# Altium PCB 复旦微阀控NB三川款主控线路板拼板_pcb.pcbdoc
Units mil, origin at the board's own origin, x right, y up, seen from the top; angles counter-clockwise.
Board outline 2380 x 2160 mil, 2 copper layers (Top Layer, Bottom Layer); 139 components, 92 nets, 421 pads, 392 vias.
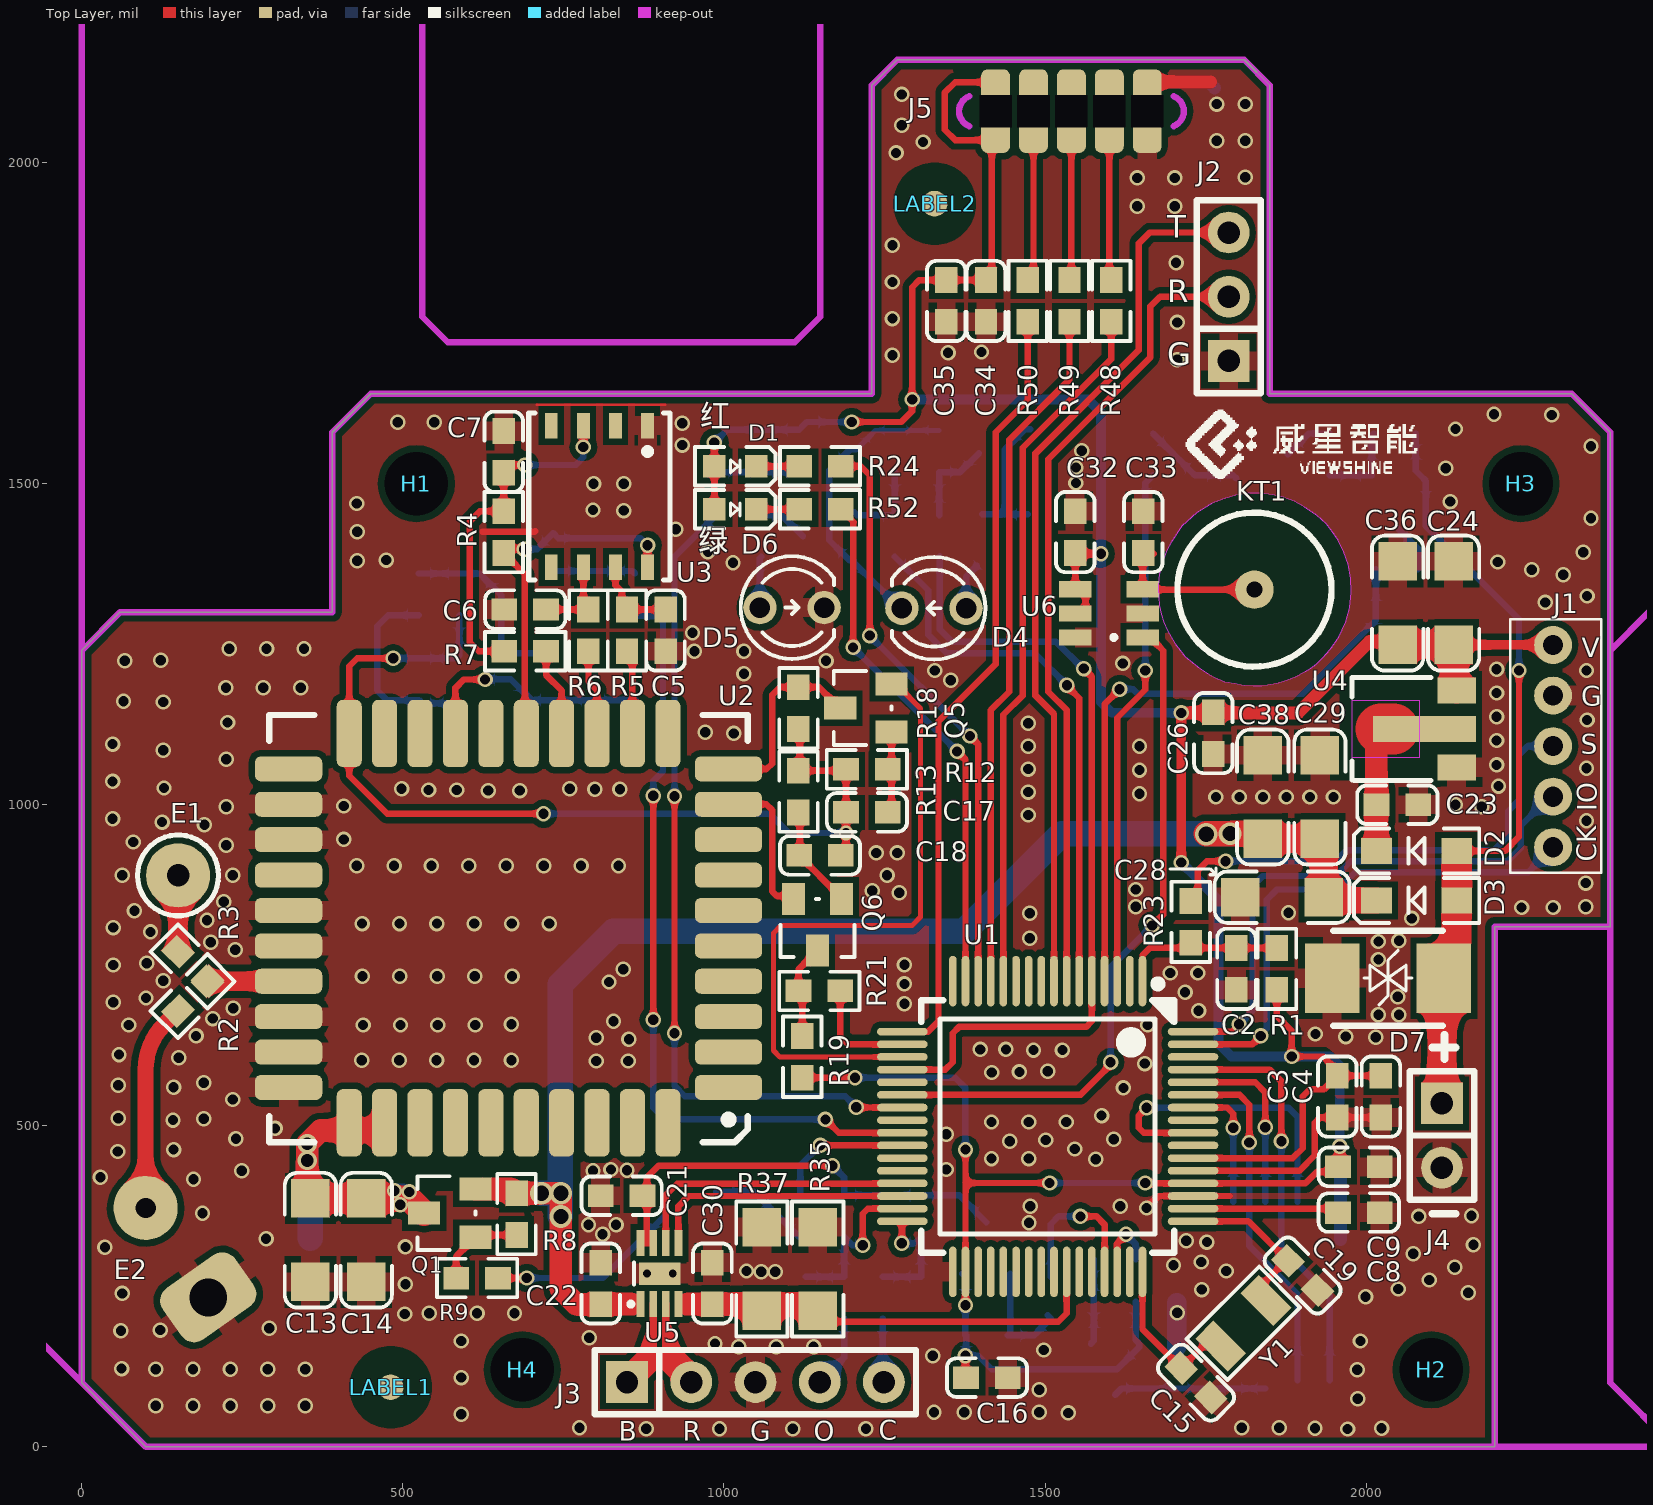
[diagram p0: Top Layer view]
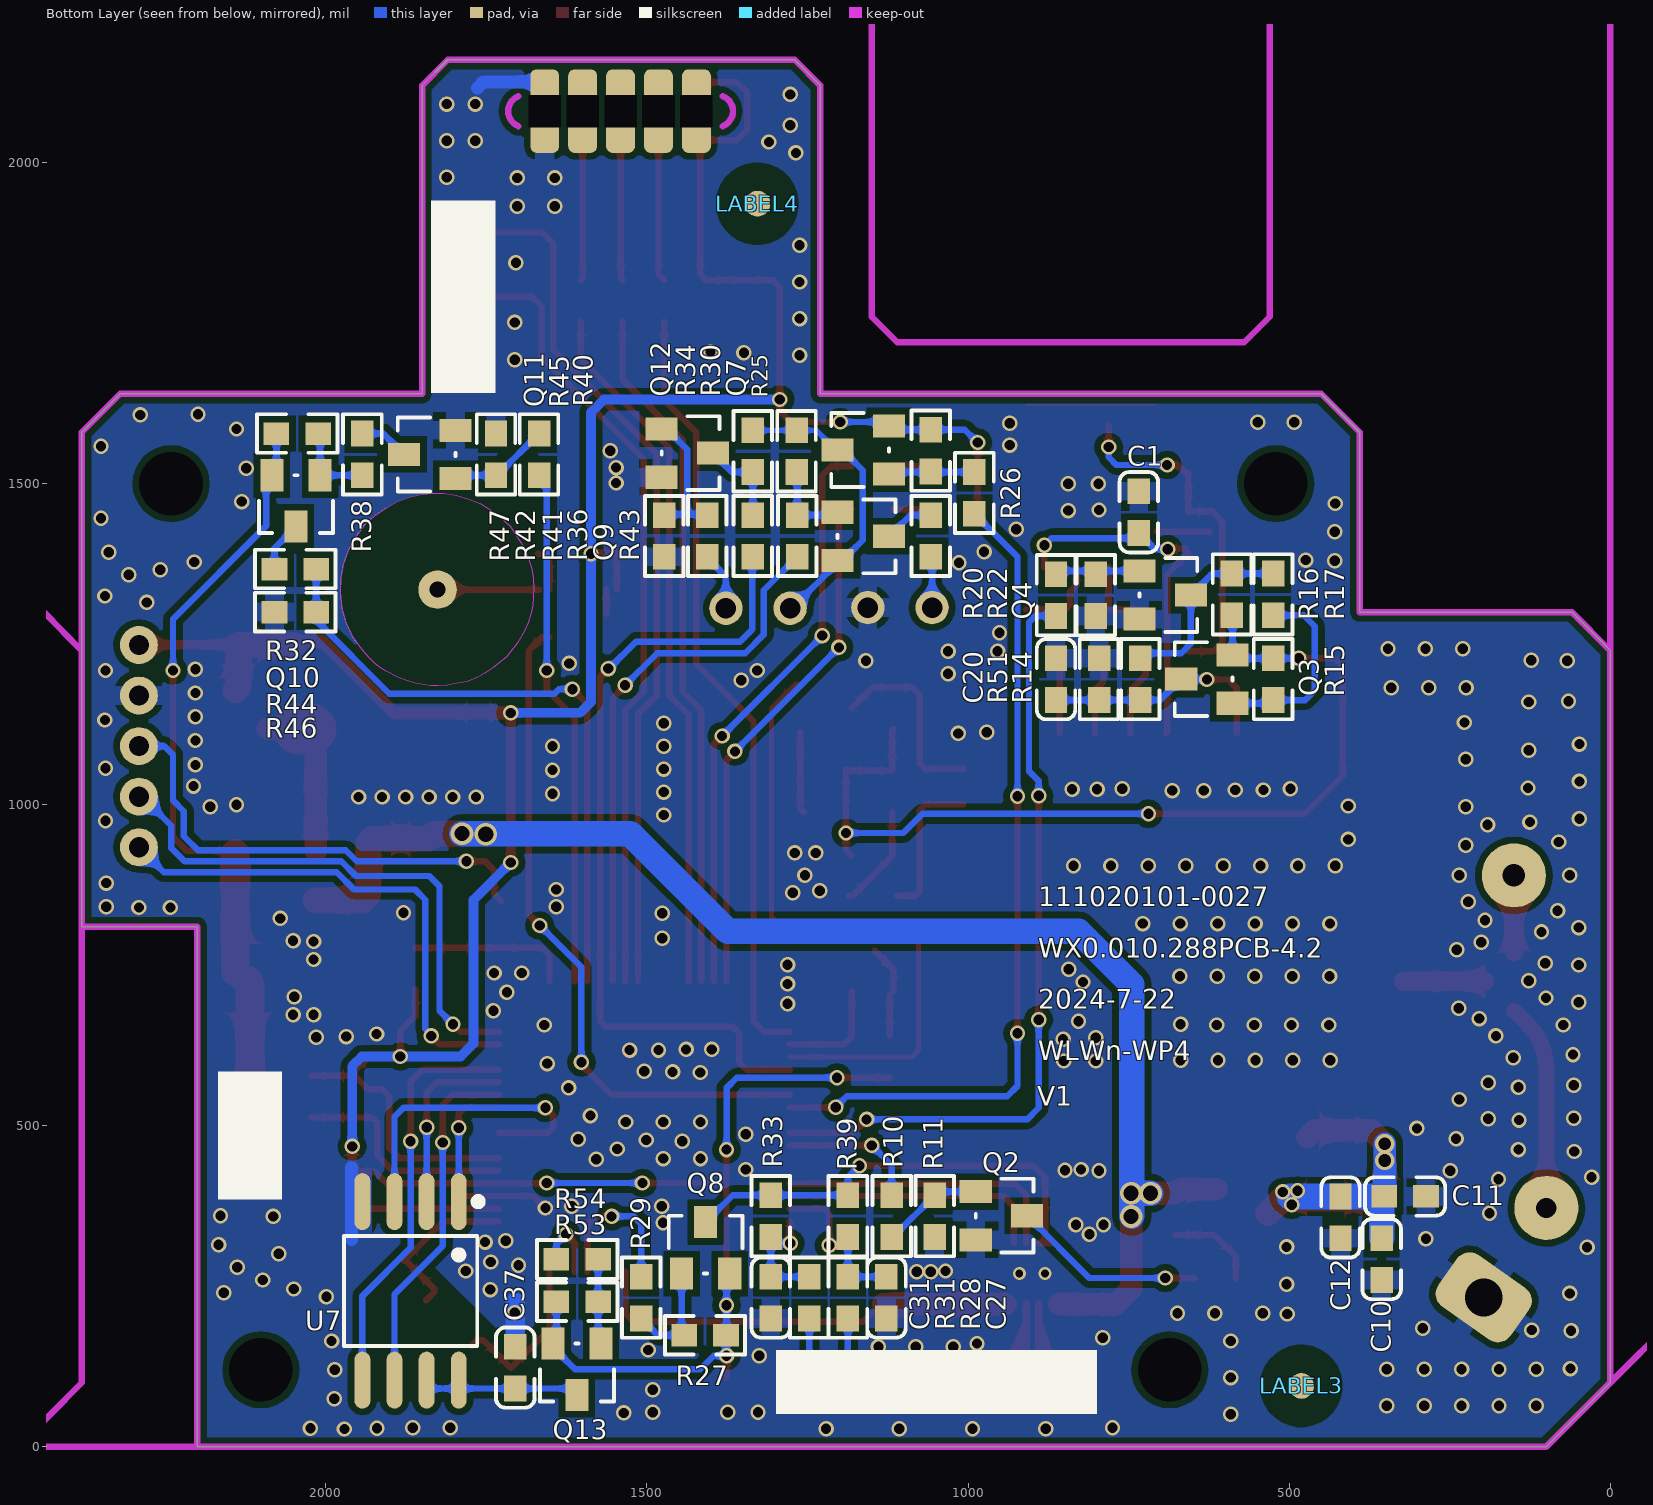
[diagram p1: Bottom Layer view, seen from below]

## Layer stack, top to bottom
Top Solder: solder mask 0.4, Solder Resist, Dk 3.5
Top Layer: signal copper 1.4
Dielectric1: dielectric 12.6, FR-4, Dk 4.8
Bottom Layer: signal copper 1.4
Bottom Solder: solder mask 0.4, Solder Resist, Dk 3.5

## Board outline
0,100 0,1240 60,1300 390,1300 390,1580 450,1640 1230,1640 1230,2120 1270,2160 1810,2160 1850,2120 1850,1640 2320,1640 2380,1580 2380,810 2200,810 2200,0 100,0
cut-out: -3391,-1710 -3381,-1710 -3381,-1700 -3391,-1700

## Design rules (kind name [scope] priority, off if disabled: settings)
Clearance Clearance_1 [inpolygon] p1: gap=10 ignorepadtopadclearanceinfootprint=FALSE except(0: Arc-Hole Track-Hole SMDPad-Hole THPad-Hole Via-Hole Fill-Hole Poly-Hole Region-Hole Text-Hole)
Clearance [All] p2: gap=7 ignorepadtopadclearanceinfootprint=FALSE except(0: Arc-Hole Track-Hole SMDPad-Hole THPad-Hole Via-Hole Fill-Hole Poly-Hole Region-Hole Text-Hole)
ComponentClearance [All] p1 off: gap=0 collisioncheckmode=3 verticalgap=0 showdistances=FALSE
FabricationTestPointUsage TestPointUsage [All] p1: valid=0 allowmultiple=FALSE
FabricationTestpoint Testpoint [All] p1: side=3 testpointundercomponent=TRUE minsize=40 maxsize=100 preferedsize=60 minholesize=0 maxholesize=40 preferedholesize=32 testpointgrid=1 allowsidetop=TRUE allowsidebottom=TRUE usegrid=TRUE gridtolerance=0.01
PolygonConnect [isvia] p1: connectstyle=Direct reliefconductorwidth=10 reliefentries=4 polygonreliefangle="90 Angle" airgapwidth=10
PolygonConnect PolygonConnect_1 [All] p2: connectstyle=Relief reliefconductorwidth=30 reliefentries=4 polygonreliefangle="90 Angle" airgapwidth=10
RoutingVias [All] p1: holewidth=16 width=24 viastyle="Through Hole" minholewidth=10 minwidth=18 maxholewidth=28 maxwidth=50
SilkToSilkClearance [All] p1: silktosilkclearance=0
SolderMaskExpansion [All] p1: expansion=4
Width [All] p1: maxlimit=50 minlimit=2 preferedwidth=10
26 further rules are at their usual default settings.

## Components (designator, comment, footprint, x,y, rotation, side; value= is the part's Value field where it differs from the comment)
C1 "100nF" C0603 734,1488 r270 bottom
C2 "100nF" C0603 1798,712 r90 top
C3 "100nF" C0603 1955,513 r90 top
C4 "10μF/10V" C0603 2023,513 r90 top
C5 "33pF" C0603 909,1239 r90 top
C6 "33pF" C0603 658,1304 r0 top
C7 "33pF" C0603 657,1517 r90 top
C8 "100nF" C0603 2021,365 r180 top
C9 "100nF" C0603 2021,436 r180 top
C10 "22pF" C0603 356,260 r90 bottom
C11 "100pF" C0603 287,390 r0 bottom
C12 "100nF" C0603 420,325 r90 bottom
C13 "100uF" C1206 356,257 r90 top
C14 "100uF" C1206 443,257 r90 top
C15 "22pF" C0603 1757.96,77.04 r135 top
C16 "100nF" C0603 1442,108 r180 top
C17 "1nF" C0603 1255,988 r180 top
C18 "1nF" C0603 1182,921 r180 top
C19 "22pF" C0603 1923.96,244.04 r135 top
C20 "33pF" C0603 863,1228 r270 bottom
C21 "100nF" C0603 808,391 r0 top
C22 "100nF" C0603 808,222 r90 top
C23 "100pF" C0603 2081,1000 r180 top
C24 "100uF" C1206 2136,1379 r270 top
C26 "100nF" C0603 1762,1079 r90 top
C27 "10nF" C0603 1127,265 r270 bottom
C28 "100uF" C1206 1804,856 r0 top
C29 "100uF" C1206 1928,1077 r270 top
C30 "10nF" C0603 982,287 r270 top
C31 "10nF" C0603 1307,200 r90 bottom
C32 "100nF" C0603 1547,1392 r90 top
C33 "4.7pF" C0603 1653,1457 r270 top
C34 "100nF" C0603 1408,1752 r90 top
C35 "1μF/16V" C0603 1346,1752 r90 top
C36 "100uF" C1206 2049,1379 r270 top
C37 "100nF" C0603 1705,156 r270 bottom
C38 "100uF" C1206 1839,1077 r270 top
D1 "Red" LED-0603 985,1527 r0 top
D2 "DSK14" SOD-123 2141,928 r180 top
D3 "DSK14" SOD-123 2141,851 r180 top
D4 "AT403" LED-3 1327,1306 r180 top
D5 "AT203-立" LED-3 1106,1307 r0 top
D6 "Green" LED-0603 985,1460 r0 top
D7 "SMBJ6.0CA" TVS-SMB 2034,730 r180 top
E1 "" ANT-1 150,890 r0 top locked
E2 "ANTENNA_3" ANT-3 197,233 r35 top
H1 "" HOLE-2.5 521,1500 r0 top locked
H2 "" HOLE-2.5 2101,120 r0 top locked
H3 "" HOLE-2.5 2241,1500 r0 top locked
H4 "" HOLE-2.5 686,120 r0 top locked
J1 "CON5-2.0" J_DIP_2.0_1*05_H 2291,1248.74 r270 top
J2 "CON3" SIP-3 1786,1691 r90 top
J3 "CON5" SIP-5 849,101 r0 top
J4 "CON2" SIP-2 2118,535 r270 top
J5 "BCON-B5" BCON-B5 1541,2080 r180 top locked
KT1 "Touch" TOUCH-1 1826,1335 r0 top locked
LABEL1 "" MARK 481,93 r90 top
LABEL2 "" MARK 1328,1936 r90 top
LABEL3 "" MARK 481,95 r90 bottom
LABEL4 "" MARK 1328,1936 r90 bottom
LABEL5 "" MARK -101.17,6993 r90 top (schematic designator LABEL1)
LABEL6 "" MARK -101.17,6766 r90 bottom (schematic designator LABEL1)
LABEL7 "" MARK 4858.83,1015 r90 top (schematic designator LABEL1)
LABEL8 "" MARK 4856.83,1301 r90 bottom (schematic designator LABEL1)
Q1 "CJ2301" SOT-23 613,326.5 r90 top
Q2 "S8050" SOT-23 988,397.5 r270 bottom
Q3 "S8550" SOT-23 588,1158 r90 bottom
Q4 "S8050" SOT-23 733,1364 r270 bottom
Q5 "S8050" SOT-23 1261,1113 r90 top
Q6 "S8050" SOT-23 1183,853 r180 top
Q7 "CJ2301" SOT-23 1123,1515 r90 bottom
Q8 "CJ2301" SOT-23 1446,270 r180 bottom
Q9 "CJ2301" SOT-23 1203,1455.5 r270 bottom
Q10 "CJ2301" SOT-23 2009,1513 r0 bottom
Q11 "S8050" SOT-23 1798,1508 r90 bottom
Q12 "S8050" SOT-23 1477,1585 r270 bottom
Q13 "S8550" SOT-23 1571.5,161 r0 bottom
R1 "10kΩ±5%" R0603 1861,777 r270 top
R2 "0Ω±5%" R0603 195.63,725.04 r225 top
R3 "0Ω±5%" R0603 149.67,771 r315 top
R4 "10kΩ±5%" R0603 657,1457 r270 top
R5 "22Ω±5%" R0603 849,1304 r270 top
R6 "22Ω±5%" R0603 789,1304 r270 top
R7 "22Ω±5%" R0603 658,1239 r0 top
R8 "200KΩ±5%" R0603 677,330 r90 top
R9 "10kΩ±5%" R0603 648,263 r180 top
R10 "4.7kΩ±5%" R0603 1119,392 r270 bottom
R11 "47K±5%" R0603 1052,327 r90 bottom
R12 "4.7kΩ±5%" R0603 1190,1055 r0 top
R13 "4.7kΩ±5%" R0603 1116,988 r90 top
R14 "0Ω±5%" R0603 732,1228 r270 bottom
R15 "47K±5%" R0603 525,1163 r90 bottom
R16 "10kΩ±5%" R0603 589,1360 r270 bottom
R17 "4.7kΩ±5%" R0603 525,1360 r270 bottom
R18 "10kΩ±5%" R0603 1116,1183 r270 top
R19 "10kΩ±5%" R0603 1122,575 r90 top
R20 "4.7kΩ±5%" R0603 863,1359 r270 bottom
R21 "0Ω±5%" R0603 1116,710 r0 top
R22 "47K±5%" R0603 801,1294 r90 bottom
R23 "0Ω±5%" R0603 1727,785 r90 top
R24 "1kΩ±5%" R0603 1117,1527 r0 top
R25 "1MΩ±5%" R0603 1058,1519 r90 bottom
R26 "1kΩ±5%" R0603 990,1453 r90 bottom
R27 "1MΩ±5%" R0603 1442,174 r180 bottom
R28 "100Ω±5%" R0603 1187,265 r270 bottom
R29 "10kΩ±5%" R0603 1509,200 r90 bottom
R30 "1MΩ±5%" R0603 1267,1518 r90 bottom
R31 "100Ω±5%" R0603 1247,265 r270 bottom
R32 "1MΩ±5%" R0603 2012,1578 r0 bottom
R33 "1kΩ±5%" R0603 1307,327 r90 bottom
R34 "100kΩ±5%" R0603 1335,1518 r90 bottom
R35 "1Ω±1%" R1206 1146,342 r270 top
R36 "1kΩ±5%" R0603 1266,1386 r90 bottom
R37 "1Ω±1%" R1206 1059,342 r270 top
R38 "10kΩ±5%" R0603 1943,1578 r270 bottom
R39 "1kΩ±5%" R0603 1187,327 r90 bottom
R40 "4.7kΩ±5%" R0603 1668,1513 r90 bottom
R41 "0Ω±5%" R0603 1335,1451 r270 bottom
R42 "20kΩ±5%" R0603 1406,1451 r270 bottom
R43 "100Ω±5%" R0603 1058,1386 r90 bottom
R44 "20K±1%" R0603 2080,1367 r180 bottom
R45 "47K±5%" R0603 1735,1578 r270 bottom
R46 "10kΩ±1%" R0603 2015,1300 r0 bottom
R47 "47K±5%" R0603 1473,1386 r90 bottom
R48 "100Ω±5%" R0603 1603,1752 r90 top
R49 "100Ω±5%" R0603 1538,1752 r90 top
R50 "100Ω±5%" R0603 1473,1752 r90 top
R51 "10kΩ±5%" R0603 796,1228 r270 bottom
R52 "1kΩ±5%" R0603 1117,1460 r0 top
R53 "200KΩ±5%" R0603 1576,226 r0 bottom
R54 "10kΩ±5%" R0603 1641,292 r180 bottom
U1 "FM33LE026" LQFP-64_L10.0-W10.0-P0.50-LS12.0-BL 1504,499 r180 top
U2 "UMN601" MB26-Y0B 1007.04,559.76 r180 top
U3 "ESIM" MFF2 881,1590 r270 top
U4 "CE6232A33P" SOT89 2043,1118 r90 top
U5 "DRV8837" WSON-8 870,222.5 r90 top
U6 "TTP233H" SOT-23-6 1652,1260.5 r90 top
U7 "P25Q32H-SUH-IR" SOIC-8 1868,243.02 r0 bottom
Y1 "32.768K" Y3215 1844,228 r225 top

## Footprints (in the part's own frame and the unit in brackets; to place one, negate y for a bottom-side part, rotate by r counter-clockwise, add the part's x,y. Pads: shape width x height; smd on the part's side, far side on the other; paste and mask are expansions set on the pad)
ANT-1 [mil]
  round 100 hole 35: 1(0,0)
  silkscreen extent -63,-63 63,63
ANT-3 [mm]
  round 2.54 hole 0.8: 1(0,4.318)
  rrect50% 3.5x2.5 hole 1.5: 2(0,0)
BCON-B5 [mil]
  rrect50% 45x40 all layers, no hole: 1(-118.11,-45) 1(-118.11,45) 2(-59.06,45) 2(-59.06,-45) 3(0,45) 3(0,-45) 4(59.06,45) 4(59.06,-45) 5(118.11,-45) 5(118.11,45)
  rect 45x70 hole 50 square: 1(-118.11,0) 2(-59.06,0) 3(0,0) 4(59.06,0) 5(118.11,0)
  Keep-Out Layer lines w10: 159.28,23.21 cw(c150,0) 159.28,-23.21 ; -159.28,23.21 ccw(c-150,0) -159.28,-23.21
C0603 [mil]
  rect 40x35 smd: 1(0,0) 2(65,0)
  silkscreen extent -30,-30 95,30
C1206 [mil]
  rect 60x60 smd: 1(0,0) 2(130,0)
  silkscreen extent -40,-40 170,40
HOLE-2.5 [mil]
  round 50 hole 99 unplated: 0(0,0)
J_DIP_2.0_1*05_H [mm]
  round 1.5 hole 0.8: 1(0,0) 2(2,0) 3(4,0) 4(6,0) 5(8,0)
  silkscreen extent -1.02,-1.7 9.02,1.91
LED-3 [mil]
  round 52 hole 31.93: 1(-50,0) 2(50,0)
  silkscreen extent -80,-80 66,80
LED-0603 [mil]
  rect 35x35 smd: 1(0,0) 2(65,0)
  silkscreen extent -30,-30 95,30
LQFP-64_L10.0-W10.0-P0.50-LS12.0-BL [mm]
  oval 0.3x2 smd: 1(-3.75,-5.75) 2(-3.25,-5.75) 3(-2.75,-5.75) 4(-2.25,-5.75) 5(-1.75,-5.75) 6(-1.25,-5.75) 7(-0.75,-5.75) 8(-0.25,-5.75) 9(0.25,-5.75) 10(0.75,-5.75) 11(1.25,-5.75) 12(1.75,-5.75) 13(2.25,-5.75) 14(2.75,-5.75) 15(3.25,-5.75) 16(3.75,-5.75) 33(3.75,5.75) 34(3.25,5.75) 35(2.75,5.75) 36(2.25,5.75) 37(1.75,5.75) 38(1.25,5.75) 39(0.75,5.75) 40(0.25,5.75) 41(-0.25,5.75) 42(-0.75,5.75) 43(-1.25,5.75) 44(-1.75,5.75) 45(-2.25,5.75) 46(-2.75,5.75) 47(-3.25,5.75) 48(-3.75,5.75)
  oval 2x0.3 smd: 17(5.75,-3.75) 18(5.75,-3.25) 19(5.75,-2.75) 20(5.75,-2.25) 21(5.75,-1.75) 22(5.75,-1.25) 23(5.75,-0.75) 24(5.75,-0.25) 25(5.75,0.25) 26(5.75,0.75) 27(5.75,1.25) 28(5.75,1.75) 29(5.75,2.25) 30(5.75,2.75) 31(5.75,3.25) 32(5.75,3.75) 49(-5.75,3.75) 50(-5.75,3.25) 51(-5.75,2.75) 52(-5.75,2.25) 53(-5.75,1.75) 54(-5.75,1.25) 55(-5.75,0.75) 56(-5.75,0.25) 57(-5.75,-0.25) 58(-5.75,-0.75) 59(-5.75,-1.25) 60(-5.75,-1.75) 61(-5.75,-2.25) 62(-5.75,-2.75) 63(-5.75,-3.25) 64(-5.75,-3.75)
  silkscreen extent -5,-5.79 5,5
MARK [mil]
  round 40 smd mask+40: 0(0,0)
MB26-Y0B [mil]
  rrect50% 105x39 smd: 1(0,0) 2(0,-55.12) 3(0,-110.24) 4(0,-165.35) 5(0,-220.47) 6(0,-275.59) 7(0,-330.71) 8(0,-385.83) 9(0,-440.94) 10(0,-496.06) 21(685.04,-496.06) 22(685.04,-440.94) 23(685.04,-385.83) 24(685.04,-330.71) 25(685.04,-275.59) 26(685.04,-220.47) 27(685.04,-165.35) 28(685.04,-110.24) 29(685.04,-55.12) 30(685.04,0)
  rrect50% 39x105 smd: 11(94.49,-551.18) 12(149.61,-551.18) 13(204.72,-551.18) 14(259.84,-551.18) 15(314.96,-551.18) 16(370.08,-551.18) 17(425.2,-551.18) 18(480.31,-551.18) 19(535.43,-551.18) 20(590.55,-551.18) 31(590.55,55.12) 32(535.43,55.12) 33(480.31,55.12) 34(425.2,55.12) 35(370.08,55.12) 36(314.96,55.12) 37(259.84,55.12) 38(204.72,55.12) 39(149.61,55.12) 40(94.49,55.12)
  silkscreen extent -30,-580 715,85
MFF2 [mil]
  rect 40x20 smd: 1(0,0) 2(0,-50) 3(0,-100) 4(0,-150) 5(220,-150) 6(220,-100) 7(220,-50) 8(220,0)
  silkscreen extent -20,-185 240,35
R0603 [mil]
  rect 40x35 smd: 1(0,0) 2(65,0)
  silkscreen extent -30,-30 95,30
R1206 [mil]
  rect 60x60 smd: 1(0,0) 2(130,0)
  silkscreen extent -40,-40 170,40
SIP-2 [mil]
  rect 65x65 hole 35: 1(0,0)
  round 65 hole 35: 2(100,0)
  silkscreen extent -50,-50 150,50
SIP-3 [mil]
  rect 65x65 hole 35: 1(0,0)
  round 65 hole 35: 2(100,0) 3(200,0)
  silkscreen extent -50,-50 250,50
SIP-5 [mil]
  rect 65x65 hole 35: 1(0,0)
  round 65 hole 35: 2(100,0) 3(200,0) 4(300,0) 5(400,0)
  silkscreen extent -50,-50 450,50
SOD-123 [mil]
  rect 48x40 smd: 1(0,0) 2(125,0)
  silkscreen extent -35,-35 160,35
SOIC-8 [mm]
  oval 0.63x2.25 smd: 1(-1.905,-3.53) 2(-0.635,-3.53) 3(0.635,-3.53) 4(1.905,-3.53) 5(1.905,3.53) 6(0.635,3.53) 7(-0.635,3.53) 8(-1.905,3.53)
  silkscreen extent -2.82,-3.68 2.64,2.18
SOT89 [mil]
  rect 40x60 smd: 1(-60,-97.98) 2(60,-97.98)
  rect 40x160.63 smd: 3(0,-47.66)
  Top Layer lines w80: 0,20 0,0.49
  Top Layer keep-out region: -45,65 45,65 45,-40 -45,-40
  silkscreen extent -80,-58 80,65
SOT-23 [mil]
  rect 36x50 smd: 1(0,0) 2(75,0) 3(37.5,80)
  silkscreen extent -20,0 95,90
SOT-23-6 [mil]
  rect 25x50 smd: 1(0,0) 2(37.5,0) 3(75,0) 4(75,105) 5(37.5,105) 6(0,105)
  silkscreen extent -3,42 3,48
TOUCH-1 [mil]
  round 60 hole 25: 1(0,0)
  silkscreen extent -120,-120 120,120
TVS-SMB [mil]
  rect 85x108 smd: 1(-87,0) 2(87,0)
  silkscreen extent -85,-74 85,74
WSON-8 [mil]
  rect 35x64 smd: 0(47.5,-30)
  rect 40x12 smd: 1(0,0) 2(0,-19.69) 3(0,-39.37) 4(0,-59.06) 5(95,-59.06) 6(95,-39.37) 7(95,-19.69) 8(95,0)
  silkscreen extent -3,10 65,18
Y3215 [mil]
  rect 40x72 smd: 1(0,0) 2(100,0)
  silkscreen extent -30,-45 130,45

## Part data
C1 C2 C3 C8 C9 C12 C16 C21 C22 C26 C32 C34 C37: library part 1, "贴片电容,100nF±10%/50V,X7R,国巨"
C4: library part 8, "贴片电容,10μF±10%/10V,X7R,村田"
C5 C6 C7 C20: library part 4, "贴片电容,33pF±10%/50V,NP0,国巨"
C10 C15 C19: library part 3, "贴片电容,22pF±5%/50V,NP0,国巨"
C11 C23: library part 9, "贴片电容,100pF±10%/50V,NP0,国巨"
C13 C14 C24 C28 C29 C36 C38: library part 16, "贴片电容,100uF±20%/6.3V,X5R,村田"
C17 C18: library part 6, "贴片电容,1nF±10%/50V,X7R,国巨"
C27 C30 C31: library part 5, "贴片电容,10nF±10%/50V,X7R,国巨"
C33: library part 18, "贴片电容,4.7pF±0.25pF/50V,NPO,国巨"
C35: library part 2, "贴片电容,1μF±10%/16V,X7R,国巨"
D1: library part 3, "发光二极管,红色,0603,光宝"
D2 D3: library part 8, "DSK14,SOD-123FL,1 A,40 V,28 V,台湾强茂集团苏州群鑫电子,DSK14"
D4: library part 6, "红外接收头，插件，红光，AT403_PD_01"
D5: library part 5, "红外发射头，插件，红光，AT203"
D6: library part 5, "发光二极管,绿色,亿光，19-217/GHC-YR1S2/3T"
D7: library part 7, "双向贴片TVS管，SMBJ6.0CA_C211762，SMB,杨杰"
E1: library part 1, "天线,5mm弹簧,电信"
E2: library part 28, "外置天线焊盘（固定孔）"
H1 H2 H3 H4: library part 22, "定位孔,孔径2.5mm,非金属化,无电气连接"
J1: library part 15, "焊接插座,间距2.0mm"
J2: library part 2, "焊接插座,间距2.54mm"
J3: library part 4, "焊接插座,间距2.54mm"
J4: library part 1, "焊接插座,间距2.54mm"
J5: library part 9, "焊接插座,90度插板双面焊盘,母头,间距1.5mm"
KT1: library part 2, "按键,6mm弹簧按键,按键直径10mm"
LABEL1 LABEL2 LABEL3 LABEL4 LABEL5 LABEL6 LABEL7 LABEL8: library part 1, "标准Mark点,直径1mm,阻焊开窗3mm"
Q1 Q7 Q8 Q9 Q10: library part 2, "贴片MOS管,PMOS,CJ2301,江苏长电"
Q2 Q4 Q5 Q6 Q11 Q12: library part 1, "贴片三极管,NPN,S8050(L),江苏长电"
Q3 Q13: library part 2, "贴片三极管,PNP,S8550(L),江苏长电"
R1 R4 R9 R16 R18 R19 R29 R38 R51 R54: library part 2, "贴片电阻,10kΩ±5%,1/10W,100ppm/℃,国巨"
R2 R3 R14 R21 R23 R41: library part 15, "贴片电阻,0Ω±5%,1/10W,100ppm/℃,国巨"
R5 R6 R7: library part 14, "贴片电阻,22Ω±5%,1/10W,100ppm/℃,国巨"
R8 R53: library part 16, "贴片电阻,200kΩ±5%,200mW,100ppm/℃,国巨"
R10 R12 R13 R17 R20 R40: library part 12, "贴片电阻,4.7kΩ±5%,1/10W,100ppm/℃,国巨"
R11 R15 R22 R45 R47: library part 22, "贴片电阻，47K,±5%,1/10W,0603,国巨,RC0603JR-0747KL"
R24 R26 R33 R36 R39 R52: library part 1, "贴片电阻,1kΩ±5%,1/10W,100ppm/℃,国巨"
R25 R27 R30 R32: library part 4, "贴片电阻,1MΩ±5%,1/10W,100ppm/℃,国巨"
R28 R31 R43 R48 R49 R50: library part 5, "贴片电阻,100Ω±5%,1/10W,100ppm/℃,国巨"
R34: library part 3, "贴片电阻,100kΩ±5%,1/10W,100ppm/℃,国巨"
R35 R37: library part 41, "贴片电阻，1Ω±1%,1/4W,1206,国巨,RC1206FR-071RL"
R42: library part 7, "贴片电阻,20kΩ±5%,1/10W,100ppm/℃,国巨"
R44: library part 23, "贴片电阻，20K,±1%,1/10W,0603,国巨,RC0603FR-0720KL"
R46: library part 6, "贴片电阻,10kΩ±1%,1/10W,100ppm/℃,国巨"
U1: library part 10, "单片机,FM33LE026,复旦微"
U2: library part 3, "集成电路,MB26-Y0B,利尔达"
U3: library part 2, "集成电路,ESIM,杭州电信"
U4: library part 6, "集成电路，CE6232A33P,SOT89"
U5: library part 2, "集成电路,DRV8837DSGR,TI"
U6: library part 5, "集成电路，TTP233H,TONTEK"
U7: library part 10, "集成电路，P25Q32H-SUH-IR，SOP-8,普冉半导体（上海）"
Y1: library part 2, "晶振,32.768KHz,±20ppm,12.5pF,3215,EPSON"

## Via types
v1: diameter 24, hole 16, Top Layer to Bottom Layer, tented both sides, 383 vias
v2: diameter 35.43, hole 23.62, Top Layer to Bottom Layer, tented both sides, 5 vias
v3: diameter 20, hole 12, Top Layer to Bottom Layer, 2 vias
v4: diameter 30, hole 20, Top Layer to Bottom Layer, tented both sides, 2 vias

## Nets (pads, with @x,y where several pads share a name; then routed paths per layer and width w, separated by ;. In a path a pad name is that pad's centre, name@x,y a point inside that pad or via, vN(x,y) a via of type N, cw(c..) or ccw(c..) an arc to the next point about the centre after c; other vN are vias at no path point)
AIN8: C30.2 R35.2 R37.2 U1.42 U5.4 | length 655.8
  Top Layer w10: R35.2 1163,195 1520.53,195 1533.53,208 U1.42
  Top Layer w35: 941,222.5 1131.5,222.5 R35.2@1132,222
ANT: R2.1 R3.2 U2.27 | length 126.4
  Top Layer w30: R2.1 195.71,725.12 U2.27
CLOSE: C31.2 R31.1 R33.1 U1.32 | length 190.8
  Top Layer w10: v1(1277,317) 1277,350.73 U1.32
  Bottom Layer w10: R31.1 C31.2 R33.1 1297,317 v1(1277,317)
CTR_F_VCC: R54.1 U1.46 | length 109.3
  Top Layer w10: U1.46 1612.27,317.27 v1(1626,331)
  Bottom Layer w10: v1(1626,331) 1641,316 R54.1
DB_RXD: J2.2 U1.7 | length 1256.5
  Top Layer w10: U1.7 1533.53,1147.47 1505,1176 1505,1538 1664,1697 1664,1776 1679,1791 J2.2
DB_TXD: J2.3 U1.8 | length 1374.3
  Top Layer w10: U1.8 1513.84,1141.16 1485,1170 1485,1547 1646,1708 1646,1874 1663,1891 J2.3
DRV+: J3.1 U5.2 | length 138.4
  Top Layer w12: J3.1 889.69,141.68 U5.2
DRV-: J3.2 U5.3 | length 137.9
  Top Layer w12: U5.3 909.37,140.63 J3.2
EXTI1: R48.1 U1.12 | length 1096.2
  Top Layer w10: U1.12 1435.1,1140.1 1465,1170 1465,1556 1603,1694 R48.1
EXTI2: R49.1 U1.13 | length 1077.4
  Top Layer w10: U1.13 1415.42,1147.42 1444,1176 1444,1568 1538,1662 R49.1
EXTI3: R50.1 U1.17 | length 1209.7
  Top Layer w10: U1.17 1317.64,646.64 1334,663 1334,1130 1423,1219 1423,1580 1473,1630 R50.1
EXTI4: R41.2 U1.5 U1.20 | length 1270.5
  Top Layer w10: U1.20 1344.58,587.58 1356,599 1356,644 1366,654 1563.9,654 1572.9,663 U1.5 1572.9,1199.1 v1(1560,1212)
  Bottom Layer w10: R41.2@1336,1387 1336,1273 1355,1254 1517,1254 1559,1212 v1(1560,1212)
FLASH_CLK: U1.59 U7.6 | length 553.9
  Top Layer w10: U1.59 1802.79,548.21 1818,533 v1(1818,474)
  Bottom Layer w10: v1(1818,474) 1818,313 1893,238 U7.6
FLASH_CS: U1.58 U7.1 | length 203.6
  Top Layer w10: U1.58 1783.47,528.53 1793,519 v1(1793,497)
  Bottom Layer w10: U7.1 v1(1793,497)
FLASH_MISO: U1.60 U7.2 | length 289.2
  Top Layer w10: U1.60 1827.1,567.9 1843,552 v1(1843,498)
  Bottom Layer w10: U7.2 v1(1843,498)
FLASH_MOSI: U1.61 U7.5 | length 641.3
  Top Layer w10: U1.61 1849.42,587.58 1868,569 v1(1868,476)
  Bottom Layer w10: v1(1868,476) 1868,310 1943,235 U7.5
FLASH_VCC: C37.2 Q13.3 U7.7 U7.8 | length 238.1
  Bottom Layer w10: Q13.3 1619,91 C37.2 U7.7@1843,91
FLASH_WP: U1.56 U7.3 | length 496.4
  Top Layer w10: v1(1658,528) 1646,516 1646,497 1653.84,489.16 U1.56
  Bottom Layer w10: v1(1658,528) 1879,528 1893,514 U7.3
GND: C1.1 C2.1 C3.1 C4.1 C5.1 C6.1 C7.2 C8.1 C9.1 C10.1 C11.1 C12.1 C13.1 C14.1 C15.1 C16.1 C19.1 C20.1 C21.1 C22.2 C23.1 C24.1 C26.1 C27.2 C28.1 C29.1 C30.1 C31.1 C32.2 C33.1 C34.1 C35.1 C36.1 C37.1 C38.1 D5.2 D7.2 E2.2 J1.2 J2.1 J3.3 J4.2 J5.1 Q2.2 Q4.2 Q11.2 Q12.2 R11.1 R22.1 R35.1 R37.1 R45.1 R46.2 R47.1 R51.1 U1.33 U1.51 U1.53 U2.22 U2.23 U2.25 U2.26 U2.28 U2.29 U2.30 U3.1 U4.1 U5.0 U6.2 U6.6 U7.4 | length 1167.4
  Top Layer w3.5: 708,1623 909,1623
  Top Layer w9: U1.51 1787.73,390.73
  Top Layer w10: 624,1425 705,1425 706,1426 ; v1(1658,372) 1676.73,390.73 U1.51 ; U1.53 1896.1,430.1 1920,454 1920,505 1928,513 C3.1 C4.1
  Top Layer w20: J5.1@1659.11,2125 1659.11,2125.64 1757.64,2125.64
  Bottom Layer w20: J5.1@1659.11,2125 1659.11,2125.64 1754.36,2125.64 1764,2116 ; 1960,323 1960,435
  Bottom Layer w30: C37.1 1705,225
  other v1: 879,28.5 993,28.5 1107,28.5 1221,28.5 1971,28 1920.25,29 2024,29 775,30 1806.25,30 1864.5,30 590.75,51 1536,53 1327,54 1374,54 1491,54 115,64 173.25,64 231.5,64 289.75,64 348,64 1987,75 1491,89 590.75,108 1986,120 115,121 173.25,121 231.5,121 289.75,121 348,121 62,122 1325,142 1498,151 1023,156 1081.25,156 1139.5,156 986,161 590.75,165 1991,165 790,170 61,181 122,182 292,185 503,207 541,208 615.5,208 673.75,208 1706,209 1999,234 63,239 2159,240 1744,245 2050,246 504,253.25 2098,260 1058,273 1080,273 1035,274 1782,274 2138,280 1700,283 1743,288 2073.25,301 36,311 504,311.5 2167,315 1752,319 1720,321 287,324 811,331 789,346 832,346 1475,349 2082,359 2164,360 188,364 1477,375 1617,375 174,417 29,420 249,430 796,430 849,431 824,432 1346,432 1579,448 1416.5,449 1474.75,449 56,460 143,463 1546,464 1445,476 1501,478 1607,479 240,480 1346,487 301,496 1416.5,506 1474.75,506 1533,506 142,509 190,511 57,512 1588,516 235,541 1622,559 143,560 57,563 190,567 1417,583 1460,584 1504,585 1655,597 801,601 851,601 436,602 494.25,602 552.5,602 610.75,602 669,602 151,606 58,611 1482,618 1527,618 1399,619 1439,619 852,635 801,637 2015,638 1968,639 178,640 1921,643 73,657 438,657 496.25,657 554.5,657 612.75,657 1660,657 669,658 828,663 204,667 2019,673 2051,673 1739,679 236,683 1281,690 49,692.25 100,699 2049,701 1718,708 1281,721 821,724 127,726 437,733 495.25,733 553.5,733 611.75,733 670,733 1695,738 1738,738 843,744 49,750.5 1281,751 101,753 2019,759 239,774 201,786 2019,787 2051,788 1476,792 107,802 49,808.75 436.5,815 494.75,815 553,815 611.25,815 669.5,815 727.75,815 195,820 2071,823 1476,831 1879,832 82,835 2242,840 2291,840 1641,841 2342,841 221,849 1273,863 1231,866 1641,868 2342,878 63,890 235,890 1254,890 428,905 486.25,905 544.5,905 602.75,905 661,905 719.25,905 777.5,905 835.75,905 1237,925 1270,925 225,937 80,942 408,946 191,969 125,973 2343,975 48,978 1474,984 225,997 2180,997 408,998 2139,1000 1766,1012 1802.6,1012 1839.2,1012 1875.8,1012 1912.4,1012 1949,1012 1647,1017 1474,1019.75 633,1022 682,1022 540,1023 584,1023 799,1024 838,1024 498,1025 760,1025 128,1026 2206,1029 48,1036.25 1647,1054 1474,1055.5 2343,1057 2203,1062 225,1071 127,1085 1474,1091.25 1647,1091 48,1094.5 2203,1100 1015,1111 971,1113 1474,1127 227,1128 2344,1132 2203,1137 127,1160 65,1161 2203,1174 224.5,1182 282.75,1182 341,1182 1353,1194 1031,1204 1328,1209 2343,1209 2203,1211 1621,1220 67,1224 1159,1224 123,1225 954,1239 1031,1239 229.5,1243 287.75,1243 346,1243 951,1268 2279,1315 2344,1325 2307,1358 2258,1366 1014,1377 2205,1378 429,1380 474,1381 2338,1393 975,1394 429,1425 925,1429 2350,1446 844,1458 796,1459 428,1469 2131,1472 797,1500 844,1500 1548,1501 2124,1524 1548,1525 1557,1551 2350,1558 935,1560 2139,1585 935,1594 492,1595.75 549,1595.75 2289,1607 2199,1608 1706,1692.75 1262.25,1700 1349,1704 1401,1705 1706,1751 1262.25,1757 1262.25,1814 1704,1844 1262.25,1871 1643.5,1932 1701.75,1932 1643.5,1976 1701.75,1976 1811.5,1977 1268,2015 1310,2032 1767.5,2034 1811.5,2034 1277,2058 1767.5,2091 1811.5,2091 1277,2106
  other v3: 880,270 920,270
IR_EN: R26.1 U1.23 | length 1287.2
  Top Layer w10: v1(923,644) v1(923,1013) ; v1(1206,529) 1206.47,528.53 U1.23
  Bottom Layer w10: v1(923,644) 923,562 939,546 1189,546 v1(1206,529) ; v1(923,1013) 923,1386 R26.1
IR_TX: R36.1 U1.6 | length 859.8
  Top Layer w10: v1(1534,1186) 1534,1184.76 1553,1165.76 1553,725.58 U1.6
  Bottom Layer w10: R36.1 1318,1334 1318,1265 1347,1236 1484,1236 v1(1534,1186)
KEY: U1.22 U6.1 | length 1063.2
  Top Layer w10: U1.22 1555.21,548.21 1602,595 v1(1602,599) ; U6.1 1663.5,1260.5 1684,1240 1684,829 v1(1667,812)
  Bottom Layer w10: v1(1602,599) 1602,747 v1(1667,812)
LED0: R24.2 U1.14 | length 908.3
  Top Layer w10: R24.2 1213,1527 1227,1513 v1(1227,1263.38) ; v1(1383,1107) 1395.73,1094.27 U1.14
  Bottom Layer w10: v1(1227,1263.38) 1227,1263 v1(1383,1107)
LED1: R52.2 U1.15 | length 815.8
  Top Layer w10: R52.2 1202,1440 1201,1439 v1(1201,1245) ; v1(1363,1083) 1376.05,1069.95 U1.15
  Bottom Layer w10: v1(1201,1245) v1(1363,1083)
NB_ON: R10.1 U1.26 | length 217.9
  Top Layer w10: v1(1150,469.47) U1.26
  Bottom Layer w10: R10.1 1119,438.47 v1(1150,469.47)
NB_RST: C20.2 Q3.3 R14.2 R51.2 U2.17 | length 371.2
  Top Layer w10: U2.17 581.84,1181.84 595,1195 v1(628,1195)
  Bottom Layer w10: v1(628,1195) 628.5,1195.5 Q3.3 700.5,1163 R14.2 R51.2 C20.2
NB_RST_MCU: R20.2 U1.25 | length 1212.1
  Top Layer w10: v1(890,665) v1(890,1014) ; v1(1158,510) 1178.84,489.16 U1.25
  Bottom Layer w10: R20.2 895,1294 905,1284 905,1052 890,1037 v1(890,1014) ; v1(890,665) 890,528 908,510 v1(1158,510)
NB_RX: Q5.3 R18.1 U2.10 | length 302.8
  Top Layer w10: U2.10 1066.83,1055.83 1075,1064 1075,1171 1087,1183 R18.1 1148.5,1183 Q5.3
NB_RX_MCU: R21.2 U1.18 | length 172.6
  Top Layer w10: R21.2 1181,639 1193.05,626.95 U1.18
NB_TX: Q6.2 U2.9 | length 236.8
  Top Layer w10: U2.9 1066,1000.71 1075,991.71 1075,865 1082,858 Q6.2@1110.5,858
NB_TX_MCU: Q5.2 U1.19 | length 1012.6
  Top Layer w8: Q5.2 1268,1188 1306,1150 1306,825 1293,812 1089,812 1077,800 1077,617.27 1087,607.27 U1.19
NetC5_2: C5.2 R5.1 U3.7 | length 133.5
  Top Layer w10: U3.7 831,1342 841,1332 841,1312 R5.1 C5.2
NetC6_2: C6.2 R6.1 U3.6 | length 135.3
  Top Layer w10: C6.2 R6.1 781,1312 U3.6
NetC7_1: C7.1 R4.1 R7.1 U3.3 | length 552
  Top Layer w10: R7.1 618,1239 604,1253 604,1441 620,1457 R4.1 C7.1 659,1515 673,1529 v1(690,1529) ; v1(781,1557) U3.3
  Bottom Layer w10: v1(690,1529) 769,1529 781,1541 v1(781,1557)
NetC8_2: C8.2 U1.50 | length 225.7
  Top Layer w10: U1.50 U1.50 C8.2@1956,371
NetC17_1: C17.1 Q5.1 R12.2 | length 127.5
  Top Layer w10: C17.1 1261,994 Q5.1
NetC18_2: C18.2 Q6.1 R13.1 | length 162
  Top Layer w10: R13.1@1118,988 1118,922 C18.2 1180,858 Q6.1@1185.5,858
NetC23_2: C23.2 D2.2 U4.3 | length 217.7
  Top Layer w35: D2.2 C23.2 U4.3@2016,1115 ; U4.3@2060,1118 U4.3
NetC33_2: C33.2 KT1.1 U6.3 | length 215.1
  Top Layer w10: U6.3 C33.2@1652,1391 ; U6.3@1668,1334.5 1668.5,1335 KT1.1 ; C33.2@1668,1390 C33.2@1669,1391
NetD1_2: D1.2 R24.1 | length 67
  Top Layer w10: D1.2 R24.1
NetD4_1: D4.1 R42.2 | length 73
  Bottom Layer w10: D4.1 1377,1355 R42.2@1394,1372
NetD4_2: D4.2 Q7.3 Q9.2 R30.2 R34.2 | length 464.6
  Bottom Layer w8: Q9.2@1195.5,1380.5 Q9.2 Q9.2@1203,1377 ; Q7.3@1195.5,1552.5 Q7.3 1205.5,1552.5 1236,1583 R30.2 R34.2 ; D4.2@1274,1306 D4.2
  Bottom Layer w10: Q9.2@1195.5,1380.5 1164,1412 1164,1521 Q7.3@1195.5,1552.5 ; Q9.2@1203,1377 D4.2@1274,1306
NetD5_1: D5.1 R43.1 | length 79.8
  Bottom Layer w10: D5.1 1056,1384 R43.1
NetD6_2: D6.2 R52.1 | length 67
  Top Layer w10: D6.2 R52.1
NetE1_1: E1.1 R3.1 | length 119.1
  Top Layer w30: R3.1 150,771.33 E1.1
NetE2_1: E2.1 R2.2 | length 323.3
  Top Layer w25: E2.1 99.49,587.48 cw(c199.49,587.48) 128.78,658.19 R2.2
NetJ1_3: J1.3 R23.2 | length 750
  Top Layer w10: R23.2 1738,861 1738,898 1752,912 v1(1781,912)
  Bottom Layer w10: v1(1781,912) 1952,912 1969,929 2199,929 2221,951 2221,990 2238,1007 2238,1078 2251.26,1091.26 J1.3
NetJ3_4: J3.4 R28.2 | length 114.7
  Bottom Layer w10: J3.4 1187,139 R28.2
NetJ3_5: J3.5 R31.2 | length 99.8
  Bottom Layer w10: R31.2 1247,103 J3.5
NetJ5_2: J5.2 R48.2 | length 219.2
  Top Layer w10: J5.2@1600.06,2035 1600.06,1819.94 R48.2
NetJ5_3: J5.3 R49.2 | length 219.2
  Top Layer w10: R49.2 1541,1820 J5.3@1541,2035
NetJ5_4: J5.4 R50.2 | length 221.7
  Top Layer w10: R50.2 1481.94,1825.94 J5.4@1481.94,2035
NetQ1_1: Q1.1 R8.1 R9.2 | length 141.4
  Top Layer w10: R9.2 583,296.5 Q1.1 616.5,330 R8.1
NetQ2_1: Q2.1 R10.2 R11.2 | length 169.4
  Bottom Layer w10: Q2.1@994.5,391 Q2.1 1046.5,397.5 R11.2 1117,327 R10.2
NetQ2_3: Q2.3 R9.1 | length 301.6
  Top Layer w10: R9.1@649,262 R9.1 v1(692.95,263.05)
  Bottom Layer w10: v1(692.95,263.05) 811.05,263.05 Q2.3
NetQ3_1: Q3.1 R15.1 R17.2 | length 308.3
  Bottom Layer w10: R17.2 477,1295 460,1278 460,1178 475,1163 R15.1 530,1158 Q3.1
NetQ4_1: Q4.1 R20.1 R22.2 | length 130.2
  Bottom Layer w10: Q4.1 857.5,1364 R20.1@861.5,1360
NetQ4_3: Q4.3 R14.1 R16.1 R17.1 | length 305.9
  Bottom Layer w10: R17.1 R16.1 619.5,1360 Q4.3 653,1251 668,1236 724,1236 R14.1
NetQ6_3: Q6.3 R19.2 R21.1 | length 147.7
  Top Layer w10: R19.2 1122,704 R21.1 1116,743.5 Q6.3
NetQ7_1: Q7.1 R25.1 R26.2 | length 134.2
  Bottom Layer w10: R26.2 1120,1518 Q7.1
NetQ8_1: Q8.1 R27.1 R29.1 | length 182.5
  Bottom Layer w10: Q8.1 1446,178 R27.1 1483,174 R29.1 R29.1@1504,205
NetQ9_1: Q9.1 R30.1 R36.2 | length 132.3
  Bottom Layer w10: Q9.1 1207.5,1451 R36.2 1266,1517 R30.1
NetQ9_3: Q9.3 R43.2 | length 78.7
  Bottom Layer w10: R43.2 1090,1451 Q9.3
NetQ10_1: Q10.1 R32.1 R38.2 | length 132.2
  Bottom Layer w10: R38.2 Q10.1 2009,1575 R32.1
NetQ10_3: Q10.3 R44.1 | length 79.9
  Bottom Layer w10: Q10.3 2080,1399.5 R44.1
NetQ11_1: Q11.1 R40.2 R45.2 | length 158.8
  Bottom Layer w10: R40.2 1731.59,1514.41 ccw(c1735,1517.83) R45.2 1793,1513 Q11.1
NetQ11_3: Q11.3 R38.1 | length 78.5
  Bottom Layer w10: Q11.3 1910.5,1578 R38.1
NetQ12_1: Q12.1 R42.1 R47.2 | length 225.3
  Bottom Layer w10: R42.1@1402,1452 1437,1452 ; R47.2@1473,1452 1437,1452 ; Q12.1 1469,1585 1437,1553 1437,1452
NetQ12_3: Q12.3 R34.1 R41.1 | length 141.2
  Bottom Layer w10: R41.1 R34.1 1367.5,1518 Q12.3
NetQ13_1: Q13.1 R53.1 R54.2 | length 132.9
  Bottom Layer w10: Q13.1 1576,165.5 R53.1 R54.2
NetR5_2: R5.2 U2.12 | length 131.5
  Top Layer w10: R5.2 857.43,1230.57 U2.12
NetR6_2: R6.2 U2.13 | length 133.6
  Top Layer w10: R6.2 789,1192 802.31,1178.68 U2.13
NetR7_2: R7.2 U2.14 | length 138.1
  Top Layer w10: R7.2 723,1202 747.2,1177.8 U2.14
OPEN: C27.1 R28.1 R39.1 U1.31 | length 270.3
  Top Layer w10: v1(1216,314) 1216,363 1224.05,371.05 U1.31
  Bottom Layer w10: C27.1 R28.1 R39.1 1200,314 v1(1216,314)
OUT_A: U1.29 U5.6 | length 450.6
  Top Layer w10: U5.6 909.37,392.37 927,410 1277.21,410 U1.29
OUT_B: U1.30 U5.5 | length 412.6
  Top Layer w10: U5.5 929.06,375 944.79,390.73 U1.30
OUT_EN: R29.2 U1.45 | length 249.6
  Top Layer w10: v1(1555,359) 1580,359 1592.58,346.42 U1.45
  Bottom Layer w10: R29.2 1509,347 1521,359 v1(1555,359)
RESET: C2.2 R1.1 R23.1 U1.1 | length 254.3
  Top Layer w10: U1.1 1651.64,765.64 1663,777 C2.2 R1.1
STATUS: U1.55
SVS: R44.2 R46.1 U1.4 | length 993.5
  Top Layer w10: U1.4 1592.58,1156.58 v1(1616,1180)
  Bottom Layer w10: v1(1616,1180) 1637,1180 1644,1173 1901,1173 2015,1287 R46.1 R44.2
SVS_EN: R40.1 U1.3 | length 810.7
  Top Layer w10: U1.3 1612.27,1135.27 1656,1179 v1(1656,1209)
  Bottom Layer w10: v1(1656,1209) 1656,1501 R40.1
SWCLK: J1.5 U1.63 | length 806.6
  Top Layer w10: U1.63 1822.95,626.95 v1(1836,640)
  Bottom Layer w10: v1(1836,640) 1836,642 1845,651 1845,852 1861.04,868.04 1956.12,868.04 1983.08,895 2252.22,895 J1.5
SWDIO: J1.4 U1.64 | length 846.3
  Top Layer w10: U1.64 1790.64,646.64 v1(1802,658)
  Bottom Layer w10: v1(1802,658) 1823,679 1823,873 1839,889 1953.04,889 1976.04,912 2220,912 2240.5,932.5 2240.5,967.5 2285.52,1012.52 J1.4
USIM_VDD: C1.2 R4.2 U2.15 U3.8 | length 577.1
  Top Layer w10: v1(689,1398) 688,1399 662,1399 663,1398 R4.2 690,1359 690,1113.02 U2.15 ; U3.8 v1(881,1404)
  Bottom Layer w10: v1(689,1398) 709,1398 C1.2 742,1415 870,1415 v1(881,1404)
VBAT: D2.1 D3.1 D7.1 J4.1 Q10.2 R32.2 | length 1209.6
  Top Layer w10: D2.1@2145,928 2216,928 2238,950 v1(2238,1209)
  Top Layer w40: D7.1 2118,727 2118,717 D7.1@2141,740
  Top Layer w45: J4.1 D7.1@2118,717 ; D7.1@2141,740 D3.1 D2.1@2141,924
  Bottom Layer w10: R32.2 2077,1520 Q10.2 2093,1504 2093,1434 2238,1289 v1(2238,1209)
VCC: C3.2 C4.2 C9.2 C16.2 C24.2 C26.2 C32.1 C34.2 C35.2 C36.2 D1.1 D6.1 J1.1 J5.5 Q7.2 Q8.2 Q13.2 R1.2 R19.1 R25.2 R27.2 R53.2 U1.34 U1.52 U1.54 U4.2 U6.4 U6.5 | length 6164.3
  Top Layer w10: D6.1 D1.1 v1(985,1564) ; R19.1 v1(1204,575) ; v1(1199,1596) 1276,1596 1293,1613 v1(1293,1631) 1293,1806 1304,1817 C35.2 C34.2 1417,1826 1417,2029.11 1422.89,2035 1360,2035 1344,2051 1344,2109 1360,2125 J5.5@1422.89,2125 ; v1(1376,142) 1376,109 C16.2 ; v1(1376.05,220.82) U1.34 1376.05,411 ; v1(1376.05,463) 1376.05,411 ; v1(1507,411) 1376.05,411 ; U6.4 C32.1 ; U6.5@1563,1297 U6.4@1563,1334.5 ; v1(1656,411) 1656,410.42 U1.52 1905.42,410.42 1923.48,428.48 1948.48,428.48 C9.2 ; U1.54 1885.79,449.79 1901,465 1901,546 1912,557 1934,557 C3.2 ; R1.2 1861,671 1884,648 v1(1884,608) 1933,608 1955,586 C3.2 ; C4.2 C3.2
  Top Layer w12: C32.1 1548,1391 v1(1587,1391)
  Top Layer w15: v1(1712,910) v1(1712,1143) ; C9.2 1959,439 v1(1959,468) ; C24.2 2290.74,1249 J1.1 ; U4.2 U4.2@2145.98,1183
  Top Layer w20: v1(1712,1143) 1894,1143 2005,1254 C36.2@2075,1254
  Top Layer w40: C36.2 C24.2 2136,1182.98 U4.2
  Bottom Layer w10: v1(985,1564) 1005,1584 R25.2 1117,1584 Q7.2 1129,1596 v1(1199,1596) ; v1(1204,575) 1360,575 1376,559 v1(1376.05,463) v1(1376.05,463) ; Q8.2 1376,265 R27.2@1376,174 ; v1(1376,142) 1396,142 1417,121 1612,121 1646.5,155.5 Q13.2 1641,166.5 R53.2 ; v1@1377,143 R27.2 ; v1(1507,411) v1(1656,411)
  Bottom Layer w15: v1(1293,1631) 1567,1631 1587,1611 v1(1587,1391) 1587,1160 1604,1143 v1(1712,1143) ; v1(1712,910) 1770,852 1770,628 1790,608 v1(1884,608) 1944,608 1959,593 v1(1959,468)
VCC-8837: C21.2 Q8.3 R33.2 R39.2 U5.7 U5.8 | length 712
  Top Layer w10: U5.8 880,317.5 ; U5.7 880,317.5 ; v1(1169,438) 898,438 880,420 880,317.5
  Bottom Layer w10: v1(1169,438) 1187,420 R39.2 ; R39.2@1187,391 R39.2 ; Q8.3 1366.5,392 R33.2 R39.2
VCC_M: C22.1 C28.2 C29.2 C38.2 D3.2 Q1.2 R8.2 U5.1 | length 2293.1
  Top Layer w35: Q1.2 670.5,401.5 R8.2 v2(716,395) v2(746,395) v2(746,359) 746,246 770,222 C22.1 ; C22.1@808,222.5 858,222.5 ; C29.2 C29.2@1934,941 ; C28.2@1934,859 C28.2@1942,851
  Top Layer w40: v2@1751,955 v2(1788,955) 1831,955 C38.2 C29.2 ; C28.2@1934,859 C29.2@1934,941 ; C28.2@1942,851 D3.2
  Bottom Layer w40: v2(716,395) v2@745,395 ; v2@745,359 v2@745,395 ; v2(1788,955) 1526,955 1374,803 828,803 745,720 v2@745,395
  other v2: 1751,954
VDD_IO: C17.2 C18.1 Q3.2 R12.1 R13.2 R15.2 R16.2 R18.2 U2.20 | length 1495
  Top Layer w10: v1(485,1228) 429,1228 416.49,1215.49 U2.20 416.49,1045 475.49,986 v1(719,986) ; R18.2 1118,1116 1118,1053 1188,1053 R12.1 C17.2 v1(1190,956) 1190,929 C18.1
  Bottom Layer w10: v1(485,1228) R15.2 583.5,1228 Q3.2@586,1230.5 ; Q3.2 588,1294 R16.2 ; v1(719,986) 1071,986 1101,956 v1(1190,956)
VDD_NB: C10.2 C11.2 C12.2 C13.2 C14.2 Q1.3 U2.31 U2.32 | length 693.7
  Top Layer w35: C13.2@351,390 v4(351,446) v4(351,472) 372,493 461,493 U2.32@472,482
  Top Layer w40: C13.2 C14.2 510,387 Q1.3
  Bottom Layer w35: C11.2@351,390 v4(351,446) v4(351,472)
  Bottom Layer w40: C10.2 356,390 C12.2 499.9,390
  other v1: 496,377 509.95,397.05 487,399
XT1: C15.2 U1.48 Y1.2 | length 257.3
  Top Layer w10: U1.48 1651.64,183.36 C15.2 1755,166 1764.58,166 Y1.2
XT2: C19.2 U1.49 Y1.1 | length 261.7
  Top Layer w10: U1.49 1816.64,351.36 C19.2 1875,290 1831,246 1831,241 Y1.1
pads on no net: H1.0 H2.0 H3.0 H4.0 LABEL1.0 LABEL2.0 LABEL3.0 LABEL4.0 LABEL5.0 LABEL6.0 LABEL7.0 LABEL8.0 U1.2 U1.9 U1.10 U1.11 U1.16 U1.21 U1.24 U1.27 U1.28 U1.35 U1.36 U1.37 U1.38 U1.39 U1.40 U1.41 U1.43 U1.44 U1.47 U1.57 U1.62 U2.1 U2.2 U2.3 U2.4 U2.5 U2.6 U2.7 U2.8 U2.11 U2.16 U2.18 U2.19 U2.21 U2.24 U2.33 U2.34 U2.35 U2.36 U2.37 U2.38 U2.39 U2.40 U3.2 U3.4 U3.5

## Polygon pours and split planes (outlines as drawn)
GND on Top Layer "Top Layer-No Net" (solid, remove dead copper, pour order 1000): -191.8,2250.4 -191.8,-88.93 2559.2,-88.93 2566.2,-81.93 2566.2,2236.07
GND on Bottom Layer "Top Layer-No Net" (solid, remove dead copper, pour order 1001): -178.5,2252.55 -178.5,-74.26 2578.5,-74.26 2580.5,-72.26 2577.5,-69.26 2577.5,2280.74

## Keep-outs
Keep-Out Layer:
  pour cut-out: 1888.12,1198.44 1905.88,1207.56 1913.88,1212.31 1923,1219.44 1932.5,1228.94 1944.12,1241.81 1957.12,1260.81 1968.12,1283.81 1974.12,1306.81 1977.12,1330.81 1976.12,1352.81 1972.12,1374.81 1965.12,1393.81 1956.12,1411.81 1947.12,1424.81 1937.62,1437.31 1924.12,1449.81 1904.62,1463.31 1888.12,1472.81 1871.12,1478.81 1854.12,1482.81 1835.12,1484.81 1816.12,1484.81 1797.12,1481.81 1778.62,1476.31 1760.38,1469.81 1736.12,1454.81 1713.12,1433.81 1696.12,1408.81 1689.44,1396.12 1684.12,1381.81 1679.62,1367.31 1677.12,1352.81 1676.12,1337.81 1677.12,1322.81 1677.93,1310.8 1681.12,1296.81 1685.12,1283.81 1690.12,1272.06 1701.62,1251.31 1718.12,1230.81 1740.62,1212.31 1752.12,1204.81 1763.75,1198.44 1780.12,1191.81 1795.12,1188.81 1810.12,1185.81 1824.88,1184.95 1836.81,1184.95 1846.88,1186.56 1860.88,1188.81 1875.88,1193.56
  lines w10: 180,7840 180,7030 0,7030 0,6260 60,6200 530,6200 530,5720 570,5680 1110,5680 1150,5720 1150,6200 1930,6200 1990,6260 1990,6540 2320,6540 2380,6600 2380,7740 2280,7840 0,7840 ; 2480,0 2380,100 2380,1240 2440,1300 2770,1300 2770,1580 2830,1640 3610,1640 3610,2120 3650,2160 4190,2160 4230,2120 4230,1640 4700,1640 4760,1580 4760,810 4580,810 4580,0 ; 2560,7840 2560,7030 2380,7030 2380,6260 2440,6200 2910,6200 2910,5720 2950,5680 3490,5680 3530,5720 3530,6200 4310,6200 4370,6260 4370,6540 4700,6540 4760,6600 ; 4760,7740 4760,0 ; 0,100 0,1240 ; 0,100 100,0 ; 0,100 0,1240 ; 0,100 100,0 ; 0,100 0,1240 ; 0,100 100,0 ; 0,100 0,7840 ; 0,1240 60,1300 ; 0,1240 60,1300 ; 0,1240 60,1300 ; 0,1240 60,1300 ; 0,1240 60,1300 ; 0,7840 ccw(c0,7643.15) -196.85,7643.15 -196.85,296.85 100,0 ; 0,7840 4660,7840 4956.85,7543.15 4956.85,196.85 cw(c4760,196.85) 4760,0 ; 60,1300 390,1300 ; 60,1300 390,1300 ; 60,1300 390,1300 ; 60,1300 390,1300 ; 60,1300 390,1300 ; 100,0 2200,0 ; 100,0 2200,0 ; 100,0 2200,0 ; 100,0 2200,0 ; 100,0 2200,0 ; 100,0 4760,0 ; 390,1300 390,1580 ; 390,1300 390,1580 ; 390,1300 390,1580 ; 390,1300 390,1580 ; 390,1300 390,1580 ; 390,1580 450,1640 ; 390,1580 450,1640 ; 390,1580 450,1640 ; 390,1580 450,1640 ; 390,1580 450,1640 ; 450,1640 1230,1640 ; 450,1640 1230,1640 ; 450,1640 1230,1640 ; 450,1640 1230,1640 ; 450,1640 1230,1640 ; 1230,1640 1230,2120 ; 1230,1640 1230,2120 ; 1230,1640 1230,2120 ; 1230,1640 1230,2120 ; 1230,1640 1230,2120 ; 1230,2120 1270,2160 ; 1230,2120 1270,2160 ; 1230,2120 1270,2160 ; 1230,2120 1270,2160 ; 1230,2120 1270,2160 ; 1270,2160 1810,2160 ; 1270,2160 1810,2160 ; 1270,2160 1810,2160 ; 1270,2160 1810,2160 ; 1270,2160 1810,2160 ; 1810,2160 1850,2120 ; 1810,2160 1850,2120 ; 1810,2160 1850,2120 ; 1810,2160 1850,2120 ; 1810,2160 1850,2120 ; 1850,1640 2320,1640 ; 1850,1640 1850,2120 ; 1850,1640 2320,1640 ; 1850,1640 1850,2120 ; 1850,1640 1850,2120 ; 1850,1640 2320,1640 ; 1850,1640 2320,1640 ; 1850,1640 1850,2120 ; 1850,1640 1850,2120 ; 1850,1640 2320,1640 ; 2200,0 2200,810 ; 2200,0 2200,810 ; 2200,0 2200,810 ; 2200,0 2200,810 ; 2200,0 2200,810 ; 2200,810 2380,810 ; 2200,810 2380,810 ; 2200,810 2380,810 ; 2200,810 2380,810 ; 2200,810 2380,810 ; 2320,1640 2380,1580 ; 2320,1640 2380,1580 ; 2320,1640 2380,1580 ; 2320,1640 2380,1580 ; 2320,1640 2380,1580 ; 2380,810 2380,1580 ; 2380,810 2380,1580 ; 2380,810 2380,1580 ; 2380,810 2380,1580 ; 2380,810 2380,1580 ; 0,2300 0,3070 180,3070 180,3880 2280,3880 2380,3780 2380,2640 2320,2580 1990,2580 1990,2300 1930,2240 1150,2240 1150,1760 1110,1720 570,1720 530,1760 530,2240 60,2240 0,2300 ; 0,4060 100,3960 2200,3960 2200,4770 2380,4770 2380,5540 2320,5600 1850,5600 1850,6080 1810,6120 1270,6120 1230,6080 1230,5600 450,5600 390,5540 390,5260 60,5260 0,5200 0,4060 ; 2380,2300 2380,3070 2560,3070 2560,3880 4660,3880 4760,3780 4760,2640 4700,2580 4370,2580 4370,2300 4310,2240 3530,2240 3530,1760 3490,1720 2950,1720 2910,1760 2910,2240 2440,2240 2380,2300 ; 2380,4060 2380,5200 2440,5260 2770,5260 2770,5540 2830,5600 3610,5600 3610,6080 3650,6120 4190,6120 4230,6080 4230,5600 4700,5600 4760,5540 4760,4770 4580,4770 4580,3960 2480,3960 2380,4060

## Other copper
Top Layer:
  pour cut-out: 2101,1037 2101,1180 1958,1180 1958,1037
  region net DRV+: 885,197 868,150 830.5,112.5 829,92 840,81 856,81 895,120 895,197
  region net DRV-: 914,197 934.5,150.5 965,120 970,92 959,81 943,81 904,120 904,197
  pour cut-out: 365,464 777,464 777,398 365,398
Multi-Layer:
  pour cut-out: 1784,103 1719,168 1833,282 1898,217

## Silkscreen, mask and mechanical layers (free items; w line width, h text height)
Top Overlay:
  drawing of 483 lines, arcs and shapes, not listed
  text "T" at 1690.61,1871 h60
  text "R" at 1690.61,1771 h60
  text "G" at 1690.61,1673 h60
  text "红" at 962,1577 h60
  text "绿" at 959,1382 h60
  text "V" at 2336,1230 h30
  text "G" at 2335,1154 h30
  text "S" at 2334,1079 h30
  text "IO" at 2359,990 h30 r90
  text "CK" at 2358,911 h30 r90
  text "C" at 1241,11 h30
  text "B" at 836,10 h30
  text "R" at 936,10 h30
  text "G" at 1041,10 h30
  text "O" at 1140,10 h30
Bottom Overlay:
  text "111020101-0027" at 891,842 h30
  text "WX0.010.288PCB-4.2" at 891,762 h30
  text "2024-7-22" at 891,682 h30
  text "WLWn-WP4" at 891,602 h30
  text "V1" at 892,531 h30